# EAGLE board CAN-D (EAGLE 9.3.0)
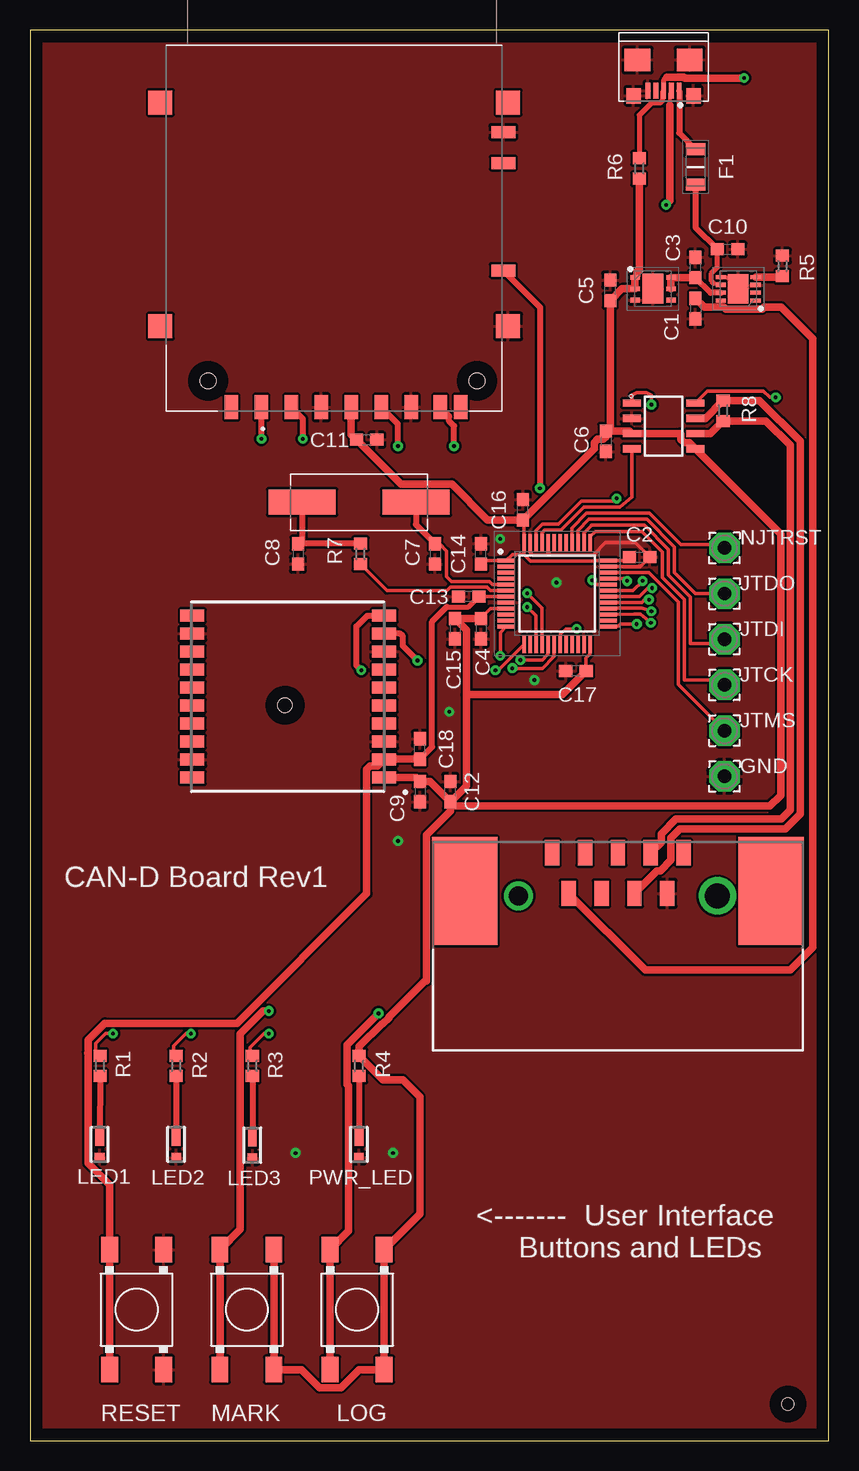
[diagram p0: board, top side]
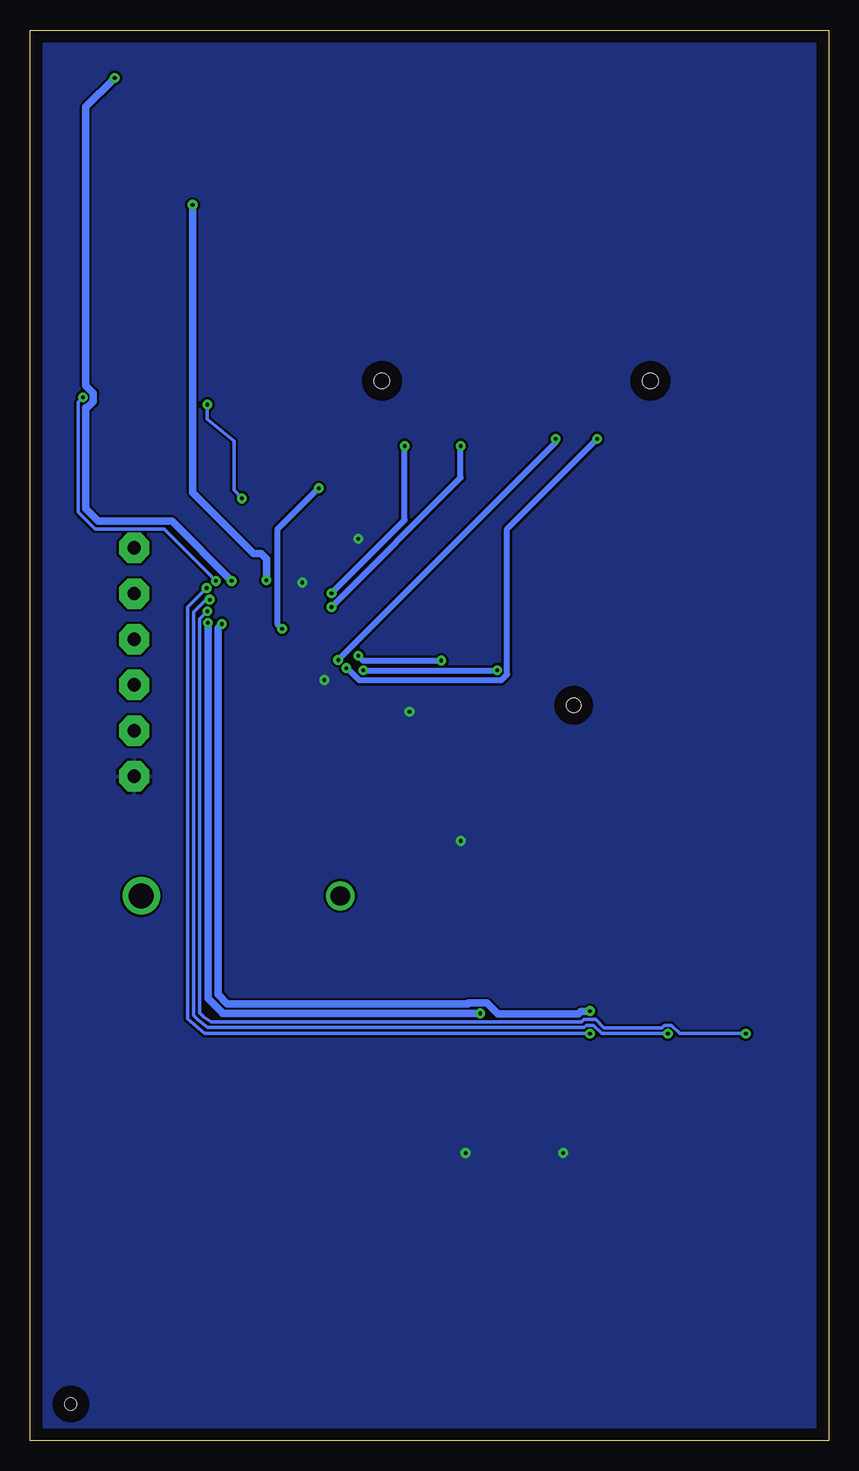
[diagram p1: board, bottom side, seen from below]

Size 66.6 x 117.59 mm. Coordinates in mm from the lower left corner, seen from the top.
Outline: 0,0 66.6,0 66.6,117.59 0,117.59 0,0
Copper layers (1*16): Top 0.035mm / dielectric 1.5mm / Bottom 0.035mm
Design rules "mine": minimum track width 11mil, minimum drill 0.3mm, track to track 8mil, track to pad 6mil, pad to pad 6mil, via to via 6mil, smd to smd 6mil, copper to edge 40mil, drill to drill 6mil, minimum pad ring 12mil, minimum via ring 10mil, stop-mask expansion 4mil, vias tented up to drill 15mil, thermal gap 10mil
Holes 1 mm at 63.2,3.05

## Footprints (pad centres in the part's own frame; a part is rotated, then mirrored left to right if it is on the bottom)
C0603 = smd 1.1 x 1: 1 -0.85,0; 2 0.85,0
SOIC127P600X175-8N = smd 1.5 x 0.6: 1 -2.65,1.905; 2 -2.65,0.635; 3 -2.65,-0.635; 4 -2.65,-1.905; 5 2.65,-1.905; 6 2.65,-0.635; 7 2.65,0.635; 8 2.65,1.905
1-1740195-2 = smd 1.2 x 2.1: 1 -5.48,-16.5; 2 -2.74,-16.5; 3 0,-16.5; 4 2.74,-16.5; 5 5.48,-16.5; 6 -4.11,-13.1; 7 -1.37,-13.1; 8 1.37,-13.1; 9 4.11,-13.1 | smd 5.45 x 9: 10 -12.775,-13.3; 11 12.775,-13.3 | drill 2.1 pad 3: 12 -8.3,-12.9 | drill 1.6 pad 2.35: 13 8.3,-12.9
FUSC3215X58N = smd 1.02 x 1.63: 1 -1.485,0; 2 1.485,0
2,54/1,1 = drill 1.118 pad 2.54 octagon: 1 0,0
FGPMMOPA6H = smd 2 x 1: 1 -16.07,-1.172; 2 -16.07,-2.672; 3 -16.07,-4.172; 4 -16.07,-5.672; 5 -16.07,-7.172; 6 -16.07,-8.672; 7 -16.07,-10.172; 8 -16.07,-11.672; 9 -16.07,-13.172; 10 -16.07,-14.672; 11 -0.07,-14.672; 12 -0.07,-13.172; 13 -0.07,-11.672; 14 -0.07,-10.172; 15 -0.07,-8.672; 16 -0.07,-7.172; 17 -0.07,-5.672; 18 -0.07,-4.172; 19 -0.07,-2.672; 20 -0.07,-1.172 | hole 1.2: -7.8,-7.2
L130-6580001400001 = smd 0.8 x 0.8: 1 -1.11,0 | smd 1.61 x 0.72: 2 0.695,0
LSH = smd 2.1 x 1.4: C1 -5,-2.25; C2 5,-2.25; NO1 -5,2.25; NO2 5,2.25
QFP50P900X900X160-48N = smd 1.475 x 0.3: 1 -4.238,2.75; 2 -4.238,2.25; 3 -4.238,1.75; 4 -4.238,1.25; 5 -4.238,0.75; 6 -4.238,0.25; 7 -4.238,-0.25; 8 -4.238,-0.75; 9 -4.238,-1.25; 10 -4.238,-1.75; 11 -4.238,-2.25; 12 -4.238,-2.75; 25 4.238,-2.75; 26 4.238,-2.25; 27 4.238,-1.75; 28 4.238,-1.25; 29 4.238,-0.75; 30 4.238,-0.25; 31 4.238,0.25; 32 4.238,0.75; 33 4.238,1.25; 34 4.238,1.75; 35 4.238,2.25; 36 4.238,2.75 | smd 0.3 x 1.475: 13 -2.75,-4.238; 14 -2.25,-4.238; 15 -1.75,-4.238; 16 -1.25,-4.238; 17 -0.75,-4.238; 18 -0.25,-4.238; 19 0.25,-4.238; 20 0.75,-4.238; 21 1.25,-4.238; 22 1.75,-4.238; 23 2.25,-4.238; 24 2.75,-4.238; 37 2.75,4.238; 38 2.25,4.238; 39 1.75,4.238; 40 1.25,4.238; 41 0.75,4.238; 42 0.25,4.238; 43 -0.25,4.238; 44 -0.75,4.238; 45 -1.25,4.238; 46 -1.75,4.238; 47 -2.25,4.238; 48 -2.75,4.238
JAE_DX4R005HJ5R2000 = smd 0.4 x 1.35: 1 -1.3,0; 2 -0.65,0; 3 0,0; 4 0.65,0; 5 1.3,0 | smd 1.2 x 1.3: SH1 -2.5,0.425; SH2 2.5,0.425 | smd 2.15 x 1.9: SH3 -2.175,-2.575; SH4 2.175,-2.575
XTAL_ABLS-8.000MHZ-B2-T = smd 5.6 x 2.1: 1 -4.75,0; 2 4.75,0
SON65P300X300X100-9N = smd 0.85 x 0.35: 1 -1.45,0.975; 2 -1.45,0.325; 3 -1.45,-0.325; 4 -1.45,-0.975; 5 1.45,-0.975; 6 1.45,-0.325; 7 1.45,0.325; 8 1.45,0.975 | smd 1.7 x 2.45: 9 0,0
R0603 = smd 1 x 1.1: 1 -0.85,0; 2 0.85,0
HRS_DM1AA-SF-PEJ(21) = smd 1.1 x 2: 1 6.875,14.95; 2 4.375,14.95; 3 1.875,14.95; 4 -0.625,14.95; 5 -3.125,14.95; 6 -5.625,14.95; 7 -8.05,14.95; 8 -9.75,14.95; 9 9.375,14.95 | smd 2 x 1: 10 -13.3,3.55; 11 -13.3,-5.4; 12 -13.3,-8 | smd 2 x 2: 13 -13.7,8.2; 14 -13.7,-10.45; 15 15.3,-10.45; 16 15.3,8.2 | hole 1.3: -11.1,12.75; 11.3,12.75
SON95P300X300X100-7N = smd 0.8 x 0.4: 1 -1.5,0.95; 2 -1.5,0; 3 -1.5,-0.95; 4 1.5,-0.95; 5 1.5,0; 6 1.5,0.95 | smd 1.75 x 2.5: 7 0,0

## Placement (x,y rotation side)
C1  0.1u  [C0603]  55.5,94.36 270 top
C2  0.1u  [C0603]  50.83,73.66 0 top
C3  10u  [C0603]  55.5,97.79 90 top
C4  10n  [C0603]  37.59,67.69 270 top
C5  10u  [C0603]  48.39,95.89 90 top
C6  0.1u  [C0603]  48.01,83.31 270 top
C7  20p  [C0603]  33.78,73.91 270 top
C8  20p  [C0603]  22.35,73.91 270 top
C9  10n  [C0603]  32.51,54.1 270 top
C10  0.1u  [C0603]  58.17,99.31 0 top
C11  10n  [C0603]  28.07,83.44 0 top
C12  1u  [C0603]  35.05,54.1 90 top
C13  0.1u  [C0603]  36.58,70.36 180 top
C14  0.1u  [C0603]  37.59,73.91 90 top
C15  1u  [C0603]  35.43,67.69 270 top
C16  0.1u  [C0603]  41.1,77.6 90 top
C17  0.1u  [C0603]  45.52,64.16 180 top
C18  0.1u  [C0603]  32.51,57.66 90 top
CANTRANSCEIVER  MCP2562-E/SN  [SOIC127P600X175-8N]  52.83,84.58 0 top
DB9  1-1740195-2  [1-1740195-2]  49.02,32.51 180 top
F1  0466.500NR  [FUSC3215X58N]  55.5,106.17 270 top
GND  [2,54/1,1]  57.91,55.37 0 top
GPS  FGPMMOPA6H  [FGPMMOPA6H]  13.46,54.1 180 top
JTCK  [2,54/1,1]  57.91,62.99 0 top
JTDI  [2,54/1,1]  57.91,66.8 0 top
JTDO  [2,54/1,1]  57.91,70.61 0 top
JTMS  [2,54/1,1]  57.91,59.18 0 top
LED1  L130-6580001400001  [L130-6580001400001]  5.82,24.69 90 top
LED2  L130-6580001400001  [L130-6580001400001]  12.19,24.69 90 top
LED3  L130-6580001400001  [L130-6580001400001]  18.54,24.64 90 top
LOG  SCHURTER-LSH-1301.9314  [LSH]  27.28,10.92 270 top
MARK  SCHURTER-LSH-1301.9314  [LSH]  18.08,10.92 270 top
MCU  STM32F302CCT6  [QFP50P900X900X160-48N]  43.94,70.61 0 top
MICROUSB  DX4R005HJ5R2000  [JAE_DX4R005HJ5R2000]  52.83,112.52 180 top
NJTRST  [2,54/1,1]  57.91,74.42 0 top
OSCILLATOR  ABLS-8.000MHZ-B2-T  [XTAL_ABLS-8.000MHZ-B2-T]  27.43,78.23 0 top
POWERMUX  TPS2115ADRBR  [SON65P300X300X100-9N]  59.05,96.01 180 top
PWR_LED  L130-6580001400001  [L130-6580001400001]  27.43,24.69 90 top
R1  550  [R0603]  5.84,31.24 270 top
R2  550  [R0603]  12.19,31.24 270 top
R3  550  [R0603]  18.54,31.24 270 top
R4  550  [R0603]  27.43,31.24 270 top
R5  250  [R0603]  62.74,97.92 270 top
R6  1K5  [R0603]  50.8,106.05 270 top
R7  1K  [R0603]  27.56,73.91 270 top
R8  120  [R0603]  57.78,85.85 90 top
RESET  SCHURTER-LSH-1301.9314  [LSH]  8.89,10.92 270 top
SDCARD  DM1AA-SF-PEJ(21)  [HRS_DM1AA-SF-PEJ(21)]  26.16,101.09 180 top
VOLTREGULATOR  LD39200PU33R  [SON95P300X300X100-7N]  51.94,96.01 0 top

## Library data of the parts
C1-C18 = rcl; SPICEPREFIX: C
CANTRANSCEIVER = MCP2562-E_SN; AVAILABILITY: Unavailable; DESCRIPTION: Microchip MCP2562-E/SN, CAN Transceiver 1MBps 1-channel IEC 61000-4-2, 8-Pin SOIC; MF: Microchip; MP: MCP2562-E/SN; PACKAGE: SO-8 Microchip; PRICE: None
DB9 = 1-1740195-2; ALLIED_NUMBER: 70287697; ALLIED_PRICE-STOCK: http://www.alliedelec.com/te-connectivity-1-1740195-2/70287697/; DESCRIPTION: 9 pos smt plug 4-40 threaded/inserts; HEIGHT: mm; MANUFACTURER_NAME: TE Connectivity; MANUFACTURER_PART_NUMBER: 1-1740195-2; MOUSER_PART_NUMBER: 571-1-1740195-2; MOUSER_PRICE-STOCK: https://www.mouser.com/Search/Refine.aspx?Keyword=571-1-1740195-2; RS_PART_NUMBER: 5269513P; RS_PRICE-STOCK: http://uk.rs-online.com/web/p/products/5269513P
F1 = 0466.500NR; DESCRIPTION: SlimLine Lead-Free 1206 surface mount fuse; HEIGHT: 0.58mm; MANUFACTURER_NAME: LITTELFUSE; MANUFACTURER_PART_NUMBER: 0466.500NR; MOUSER_PART_NUMBER: 576-0466.500NR; MOUSER_PRICE-STOCK: https://www.mouser.com/Search/Refine.aspx?Keyword=576-0466.500NR; RS_PART_NUMBER: 5413568; RS_PRICE-STOCK: http://uk.rs-online.com/web/p/products/5413568
GND JTCK JTDI JTDO JTMS NJTRST = wirepad
GPS = FGPMMOPA6H; DESCRIPTION: GPS Standalone Module, 20-pin; HEIGHT: mm; MANUFACTURER_NAME: GlobalTop Technology Inc.; MANUFACTURER_PART_NUMBER: FGPMMOPA6H
LED1-LED3 PWR_LED = L130-6580001400001; ALLIED_NUMBER: 70522463; ALLIED_PRICE-STOCK: http://www.alliedelec.com/lumileds-l130-6580001400001/70522463/; DESCRIPTION: Lumileds L130-6580001400001, LUXEON 3014 Series White LED, 6500K, 3014, Rectangle Lens SMD Package; HEIGHT: mm; MANUFACTURER_NAME: Lumileds; MANUFACTURER_PART_NUMBER: L130-6580001400001; MOUSER_PART_NUMBER: 997-L130-65800014001; MOUSER_PRICE-STOCK: https://www.mouser.com/Search/Refine.aspx?Keyword=997-L130-65800014001; RS_PART_NUMBER: 1709867; RS_PRICE-STOCK: http://uk.rs-online.com/web/p/products/1709867
LOG MARK RESET = schurter_switches_LSH_SMS
MCU = STM32F302CCT6; ALLIED_NUMBER: 70520771; ALLIED_PRICE-STOCK: http://www.alliedelec.com/stmicroelectronics-stm32f302cct6/70520771/; HEIGHT: 1.6mm; MANUFACTURER_NAME: STMicroelectronics; MANUFACTURER_PART_NUMBER: STM32F302CCT6; MOUSER_PART_NUMBER: 511-STM32F302CCT6; MOUSER_PRICE-STOCK: https://www.mouser.com/Search/Refine.aspx?Keyword=511-STM32F302CCT6; RS_PART_NUMBER: 1656736; RS_PRICE-STOCK: http://uk.rs-online.com/web/p/products/1656736
MICROUSB = DX4R005HJ5R2000; DESCRIPTION: DX4 series, receptacle, on-board, right-angle standard mount, surface mount; DIGI-KEY_PART_NUMBER: 670-2674-1-ND; DIGI-KEY_PURCHASE_URL: https://www.digikey.ca/product-detail/en/jae-electronics/DX4R005HJ5R2000/670-2674-1-ND/3903234?utm_source=snapeda&utm_medium=aggregator&utm_campaign=symbol; MF: JAE Electronics; MP: DX4R005HJ5R2000; PACKAGE: None
OSCILLATOR = ABLS-8.000MHZ-B2-T; AVAILABILITY: Unavailable; DESCRIPTION: Crystal 8MHz Â±20ppm _Tol_ Â±50ppm _Stability_ 18pF FUND 80Ohm 2-Pin HC-49/US SMD T/R; MF: Abracon LLC; MP: ABLS-8.000MHZ-B2-T; PACKAGE: HC49/US Abracon; PRICE: None
POWERMUX = TPS2115ADRBR; DESCRIPTION: Autoswitching Power Mux; HEIGHT: 1mm; MANUFACTURER_NAME: Texas Instruments; MANUFACTURER_PART_NUMBER: TPS2115ADRBR; MOUSER_PART_NUMBER: 595-TPS2115ADRBR; MOUSER_PRICE-STOCK: https://www.mouser.com/Search/Refine.aspx?Keyword=595-TPS2115ADRBR
R1-R8 = rcl; SPICEPREFIX: R
SDCARD = DM1AA-SF-PEJ_21_; DESCRIPTION: DM1 Series 12 _9+3_ Position 2.90 mm Pitch SMT Right Angle PC Card Connector; DIGI-KEY_PART_NUMBER: HR845CT-ND; DIGI-KEY_PURCHASE_URL: https://www.digikey.ca/product-detail/en/hirose-electric-co-ltd/DM1AA-SF-PEJ_21_/HR845CT-ND/559985?utm_source=snapeda&utm_medium=aggregator&utm_campaign=symbol; MF: Hirose; MP: DM1AA-SF-PEJ_21_; PACKAGE: None
VOLTREGULATOR = LD39200PU33R; DESCRIPTION: LDO Voltage Regulators 2 A high PSRR ultra low drop linear regulator with reverse current protection; HEIGHT: 1mm; MANUFACTURER_NAME: STMicroelectronics; MANUFACTURER_PART_NUMBER: LD39200PU33R; MOUSER_PART_NUMBER: 511-LD39200PU33R; MOUSER_PRICE-STOCK: https://www.mouser.com/Search/Refine.aspx?Keyword=511-LD39200PU33R

## Nets
CAN_RX: CANTRANSCEIVER.4 MCU.45
CAN_STBY: CANTRANSCEIVER.8 MCU.31
CAN_TX: CANTRANSCEIVER.1 MCU.46
DB9VCC: C1.1 DB9.9 POWERMUX.8
GND: C1.2 C2.2 C3.2 C4.2 C5.2 C6.2 C7.2 C8.2 C9.2 C10.2 C11.2 C12.2 C13.2 C14.2 C15.2 C16.2 C17.2 C18.2 CANTRANSCEIVER.2 DB9.6 GND.1 GPS.3 GPS.8 GPS.12 GPS.19 LED1.1 LED2.1 LED3.1 MCU.8 MCU.23 MCU.35 MCU.44 MCU.47 MICROUSB.5 MICROUSB.SH1 MICROUSB.SH2 MICROUSB.SH3 MICROUSB.SH4 POWERMUX.3 POWERMUX.5 POWERMUX.9 PWR_LED.1 R5.1 RESET.NO1 RESET.NO2 SDCARD.3 SDCARD.6 SDCARD.12 SDCARD.13 VOLTREGULATOR.3 VOLTREGULATOR.7
LED1: MCU.28 R1.1
LED2: MCU.29 R2.1
LED3: MCU.30 R3.1
N$1: C3.1 POWERMUX.7 VOLTREGULATOR.5 VOLTREGULATOR.6
N$2: CANTRANSCEIVER.7 DB9.7 R8.2
N$3: LED1.2 R1.2
N$4: LED2.2 R2.2
N$5: LED3.2 R3.2
N$6: PWR_LED.2 R4.2
N$7: CANTRANSCEIVER.6 DB9.2 R8.1
N$8: POWERMUX.4 R5.2
N$9: C10.1 F1.2 POWERMUX.6
N$10: C8.1 OSCILLATOR.1 R7.1
N$11: MARK.C1 MARK.C2 MCU.25
N$19: LOG.C1 LOG.C2 MCU.27
RCC_OSC_IN: C7.1 MCU.5 OSCILLATOR.2
RCC_OSC_OUT: MCU.6 R7.2
RESET: C13.1 C18.1 GPS.2 MCU.7 RESET.C1 RESET.C2
SD_CD: MCU.19 SDCARD.10
SD_CS: MCU.18 SDCARD.1
SD_MISO: MCU.16 SDCARD.7
SD_MOSI: MCU.17 SDCARD.2
SD_SCK: MCU.15 SDCARD.5
SYS_JTCK-SWCLK: JTCK.1 MCU.37
SYS_JTDI: JTDI.1 MCU.38
SYS_JTDO-TRACESWO: JTDO.1 MCU.39
SYS_JTMS-SWDIO: JTMS.1 MCU.34
SYS_NJTRST: MCU.40 NJTRST.1
USART2_RX: GPS.10 MCU.13
USART2_TX: GPS.9 MCU.12
USB_DM: MCU.32 MICROUSB.2
USB_DP: MCU.33 MICROUSB.3 R6.1
USBVCC: F1.1 MICROUSB.1
VCC: C2.1 C4.1 C5.1 C6.1 C9.1 C11.1 C12.1 C14.1 C15.1 C16.1 C17.1 CANTRANSCEIVER.3 CANTRANSCEIVER.5 GPS.1 LOG.NO1 LOG.NO2 MARK.NO1 MARK.NO2 MCU.1 MCU.9 MCU.24 MCU.36 MCU.48 R4.1 R6.2 SDCARD.4 VOLTREGULATOR.1 VOLTREGULATOR.2

## Tracks (layer width: path | path; a pad name or v marks a point on that pad's centre or on a via)
CAN_RX
  Top 0.279: MCU.45 42.69,75.67 42.74,75.71
  Top 0.305: 42.74,75.71 42.92,75.89 44.26,75.89 46.19,77.83 49.17,77.83 50.19,78.64 CANTRANSCEIVER.4
CAN_STBY  (via drill 0.3)
  Top 0.279: MCU.31 50.29,70.86 v51.09,71.66 | v62.18,86.97 61.67,86.97 61.15,87.49 56.49,87.49 CANTRANSCEIVER.8
  Bottom 0.279: v51.09,71.66 55.42,76 61.16,76 62.59,77.42 62.59,86.56 v62.18,86.97
CAN_TX  (via drill 0.3)
  Top 0.279: MCU.46 42.2,75.87 42.71,76.39 44.05,76.39 45.99,78.32 48.71,78.32 v48.92,78.54
  Top 0.305: CANTRANSCEIVER.1 50.19,87.17 50.6,87.38 51.41,87.38 51.82,87.17 v51.82,86.36
  Bottom 0.279: v48.92,78.54 49.58,79.25 49.58,83.31 51.82,85.14 v51.82,86.36
DB9VCC
  Top 0.305: POWERMUX.8 57.6,94.74 58.02,94.33
  Top 0.61: C1.1 56.22,94.49 57.86,94.49 58.02,94.33 61.04,94.33 61.2,94.49 62.64,94.49 65.28,91.85 65.28,41.1 63.4,39.22 51.31,39.22 DB9.9
GND  (via drill 0.3)
  Top 0.279: MCU.35 50.88,72.86 C2.2 50.48,74.85 47.99,74.85 46.96,73.82 43.42,73.82 | 43.42,73.82 41.92,73.82 41.71,74.03 41.71,74.83 MCU.47 | MCU.44 43.19,74.05 43.42,73.82
  Top 0.305: POWERMUX.5 58.08,96.99 POWERMUX.9
  other vias: 43.89,71.53 39.22,75.18 42.06,63.4 30.68,49.99 22.15,23.98 34.95,60.76 30.28,23.98
  pour Top: -1.27,-1.27 68.58,-1.27 68.58,118.87 -1.27,118.87
  pour Bottom: -1.42,119.08 68.68,119.08 68.68,-1.42 -1.42,-1.42
LED1  (via drill 0.3)
  Top 0.279: MCU.28 48.75,69.39 51,69.39 v51.82,69.14 | v6.91,33.93 6.3,33.93 5.49,33.12 5.49,32.51 R1.1
  Bottom 0.279: v51.82,69.14 52.46,68.49 52.46,35.66 52.12,35.32 51.49,34.91 20.61,34.91 20.4,35.12 19.42,35.12 18.73,34.42 13.92,34.42 13.7,34.63 13.12,34.63 12.42,33.93 v6.91,33.93
LED2  (via drill 0.3)
  Top 0.279: v51.61,70.11 51.24,70.11 51.01,69.87 MCU.29 | v13.41,33.93 13.01,33.93 11.99,32.92 11.99,32.3 R2.1
  Bottom 0.279: v51.61,70.11 51.93,70.11 52.95,69.09 52.95,35.44 52.57,35.06 51.81,34.43 20.41,34.43 20.2,34.63 19.62,34.63 18.93,33.93 v13.41,33.93
LED3  (via drill 0.3)
  Top 0.279: MCU.30 50.8,70.37
  Top 0.305: v51.87,71.07 51.51,71.07 50.8,70.37 | v19.91,33.93 19.51,33.93 18.34,32.77 18.34,32.3 R3.1
  Bottom 0.305: v51.87,71.07 53.44,69.49 53.44,35.15 52.02,33.93 v19.91,33.93
N$1
  Top 0.508: POWERMUX.7 56.75,95.69 C3.1
  Top 0.61: C3.1 53.47,96.94 VOLTREGULATOR.6 VOLTREGULATOR.5
N$2
  Top 0.61: CANTRANSCEIVER.7 56.3,85.22 R8.2 60.82,86.7 64.21,83.31 64.21,52.22 62.99,51 54.2,51 53.45,50.25 53.45,48.4 52.55,47.51 52.28,47.51 DB9.7
N$3
  Top 0.508: R1.2 LED1.2
N$4
  Top 0.508: R2.2 LED2.2
N$5
  Top 0.508: R3.2 LED3.2
N$6
  Top 0.508: R4.2 PWR_LED.2
N$7
  Top 0.61: CANTRANSCEIVER.6 56.73,83.95 R8.1 61.37,85 63.4,82.97 63.4,52.56 62.66,51.82 53.86,51.82 52.63,50.59 52.63,49.88 DB9.2
N$8
  Top 0.61: POWERMUX.4 62.66,96.99 R5.2
N$9
  Top 0.305: 57.03,96.46 57.49,96.46 POWERMUX.6
  Top 0.406: 57.03,96.46 56.82,96.67 56.82,97.31 57.32,97.8 C10.1
  Top 0.508: F1.2 55.5,101.13 C10.1
N$10
  Top 0.508: R7.1 C8.1 22.68,75.09 OSCILLATOR.1
N$11  (via drill 0.3)
  Top 0.305: MCU.25 48.23,67.91 49.04,67.91 49.21,68.07 v50.6,68.07
  Top 0.61: v19.91,35.81 19.44,35.81 17.54,33.91 17.54,17.62 MARK.C1 MARK.C2
  Bottom 0.61: v50.6,68.07 50.92,67.75 50.92,37.19 50.16,36.42 30.08,36.42 30.02,36.47 28.5,36.47 27.58,35.56 20.87,35.56 20.67,35.76 19.96,35.76 v19.91,35.81
N$19  (via drill 0.3)
  Top 0.305: v51.77,68.18 50.88,68.89 50.39,68.89 MCU.27
  Top 0.61: LOG.C2 LOG.C1 26.57,17.47 26.57,29.55 26.43,29.7 26.43,32.98 v29.05,35.61 v29.06,35.61
  Bottom 0.61: v29.06,35.61 50.53,35.61 50.53,35.64 51.74,36.85 51.74,68.15 v51.77,68.18
RCC_OSC_IN
  Top 0.279: MCU.5 38.57,71.36 38.3,71.63 35.15,71.63 34.75,72.04 34.75,74.17 34.15,74.76 C7.1
  Top 0.508: OSCILLATOR.2 32.18,76.36 C7.1
RCC_OSC_OUT
  Top 0.279: R7.2 29.76,70.86 34.77,70.86 35.05,71.15 38.1,71.15 38.38,70.86 MCU.6
RESET
  Top 0.279: MCU.7 C13.1
  Top 0.406: 34.75,69.49 36.56,69.49 C13.1
  Top 0.508: C18.1 33.53,57.82 33.53,68.28 34.75,69.49
  Top 0.61: C18.1 29.57,56.81 GPS.2 28.99,56.23 28.34,56.23 28.07,55.96 28.07,45.6 17.27,34.8 6.25,34.8 4.83,33.39 4.83,32.49 4.82,32.3 4.83,32.28 4.83,23.11 6.64,21.31 RESET.C1 RESET.C2
SD_CD  (via drill 0.3)
  Top 0.279: MCU.19 44.25,66.43 44.25,67.23 44.69,67.67 v45.57,67.67
  Top 0.508: SDCARD.10 42.52,94.48 v42.52,79.4
  Bottom 0.508: v42.52,79.4 45.98,75.94 45.98,68.08 v45.57,67.67
SD_CS  (via drill 0.3)
  Top 0.279: MCU.18 43.69,65.35 42.72,64.38 40.61,64.38 40.6,64.39 v40.22,64.39
  Top 0.508: v19.3,83.52 19.3,86.12 SDCARD.1
  Bottom 0.508: v40.22,64.39 40.15,64.39 39.15,63.4 27.3,63.4 26.82,63.88 26.82,76 v19.3,83.52
SD_MISO  (via drill 0.3)
  Top 0.279: MCU.16 42.69,69.41 v41.46,70.64
  Top 0.508: SDCARD.7 34.96,85.4 34.96,84.97 35.36,84.57 v35.36,82.91
  Bottom 0.508: v41.46,70.64 35.36,76.75 v35.36,82.91
SD_MOSI  (via drill 0.3)
  Top 0.305: MCU.17 43.19,65.55 42.71,65.08 v40.9,65.08
  Top 0.508: v22.76,83.52 22.76,85.17 SDCARD.2
  Bottom 0.508: v40.9,65.08 22.76,83.22 v22.76,83.52
SD_SCK  (via drill 0.3)
  Top 0.279: MCU.15 42.19,68.76 v41.46,69.49
  Top 0.508: v30.68,82.91 30.68,84.75 SDCARD.5
  Bottom 0.508: v41.46,69.49 30.68,80.27 v30.68,82.91
SYS_JTCK-SWCLK
  Top 0.305: JTCK.1 57.51,63.4 54.56,63.4 54.56,70.11 52.73,71.94 52.73,74.08 51.02,75.79 47.14,75.79 46.69,75.34 MCU.37
SYS_JTDI
  Top 0.279: MCU.38 46.2,75.66 46.83,76.28 46.83,76.3
  Top 0.305: JTDI.1 57.56,66.45 55.07,66.45 55.07,70.32 53.24,72.15 53.24,74.29 51.23,76.3 46.83,76.3
SYS_JTDO-TRACESWO
  Top 0.279: MCU.39 45.68,74.87 45.68,75.87
  Top 0.305: JTDO.1 55.49,70.61 53.75,72.36 53.75,74.5 51.44,76.81 46.62,76.81 45.68,75.87
SYS_JTMS-SWDIO
  Top 0.279: MCU.34 51.59,72.36
  Top 0.305: JTMS.1 54.05,63.04 54.05,69.9 51.59,72.36
SYS_NJTRST
  Top 0.279: MCU.40 45.19,75.66 45.18,75.67 45.18,76.07 45.17,76.08 | 54.26,74.71 57.62,74.71 NJTRST.1
  Top 0.305: 54.26,74.71 51.65,77.32 46.4,77.32 45.17,76.08
USART2_RX  (via drill 0.3)
  Top 0.305: MCU.13 39.03,64.21 v38.81,64.21
  Top 0.508: v27.64,64.21 27.23,64.62 27.23,67.87 28.13,68.77 GPS.10
  Bottom 0.508: v38.81,64.21 v27.64,64.21
USART2_TX  (via drill 0.3)
  Top 0.305: MCU.12 39.22,67.38 v39.22,65.43
  Top 0.508: v32.31,65.02 31.09,66.24 31.09,67.06 30.87,67.27 GPS.9
  Bottom 0.508: v39.22,65.43 38.81,65.02 v32.31,65.02
USB_DM  (via drill 0.3)
  Top 0.279: MCU.32 47.25,71.36 v46.88,71.73
  Top 0.305: MICROUSB.2 53.39,112.43 53.39,112.29 53.37,112.27 53.37,111.33
  Top 0.61: v53.03,103.02 53.37,103.36 53.37,111.33
  Bottom 0.61: v46.88,71.73 46.88,73.5 47.35,73.97 47.95,73.97 53.03,79.05 v53.03,103.02
USB_DP  (via drill 0.3)
  Top 0.279: MCU.33 49.59,71.86 v49.78,71.66
  Top 0.406: 53.09,113.65 52.83,113.39 MICROUSB.3 52.74,112.43 52.74,111.7 52.53,111.49 51.8,111.49 50.8,110.49 R6.1
  Top 0.61: v59.54,113.59 54.59,113.59 54.52,113.65 53.09,113.65
  Bottom 0.61: v49.78,71.66 54.77,76.64 60.9,76.64 61.94,77.69 61.94,86.11 61.82,86.11 61.32,86.61 61.32,87.33 61.94,87.95 61.94,111.19 v59.54,113.59
USBVCC
  Top 0.508: MICROUSB.1 54.13,109.02 F1.1
VCC
  Top 0.279: MCU.24 46.69,65.56 46.65,65.51 | C2.1 49.68,73.36 MCU.36 47.19,73.36 47.16,73.34 41.72,73.34 41.19,73.87 | MCU.48 41.19,73.87 | MCU.1 40.21,73.87 41.19,73.87
  Top 0.305: MCU.9 38.41,69.36 C4.1 | 46.65,65.51 46.37,65.23 C17.1 | MCU.1 37.89,73.36 C14.1 | MCU.48 41.19,76.65 C16.1
  Top 0.61: R6.2 50.8,97.64 50.61,97.45 50.61,97.13 VOLTREGULATOR.1 VOLTREGULATOR.2 49.36,96.01 C5.1 48.39,84.54 C6.1 | C6.1 49.97,84.16 CANTRANSCEIVER.3 54.21,83.95 54.27,83.88 54.27,83.46 54.54,83.19 54.97,83.19 CANTRANSCEIVER.5 62.59,75.57 62.59,53.78 61.7,52.9 35.41,52.9 C12.1 | C6.1 48.01,83.66 47.82,83.47 47.32,83.47 47.05,83.2 47.05,82.7 C16.1 38.16,76.75 35.17,79.74 30.92,79.74 C11.1 26.79,83.87 SDCARD.4 | GPS.1 32.19,55.27 C9.1 33.35,54.95 C12.1 | C4.1 C15.1 36.39,67.58 36.39,62.18 | 36.39,62.18 36.39,54.59 C12.1 | MARK.NO1 MARK.NO2 22.63,5.92 24.14,4.42 25.92,4.42 27.43,5.92 LOG.NO2 LOG.NO1 32.51,18.9 32.51,28.65 31.09,30.07 29.45,30.07 R4.1 27.43,32.84 29.34,34.75 29.41,34.75 29.92,35.25 29.92,35.33 32.92,38.33 33.06,38.33 33.06,50.5 35.05,52.49 C12.1 | C17.1 44.39,62.18 36.39,62.18

## Text on the board
tPlace: CAN-D Board Rev1 | <------- User Interface / Buttons and LEDs